# Altium PCB PCB1fbb.PcbDoc
Units mil, origin at the board's own origin, x right, y up, seen from the top; angles counter-clockwise.
Board outline 775 x 2070.57 mil, 2 copper layers (Top Layer, Bottom Layer); 38 components, 55 nets, 170 pads, 36 vias.
Unrouted connection lines stored in the file: 33.
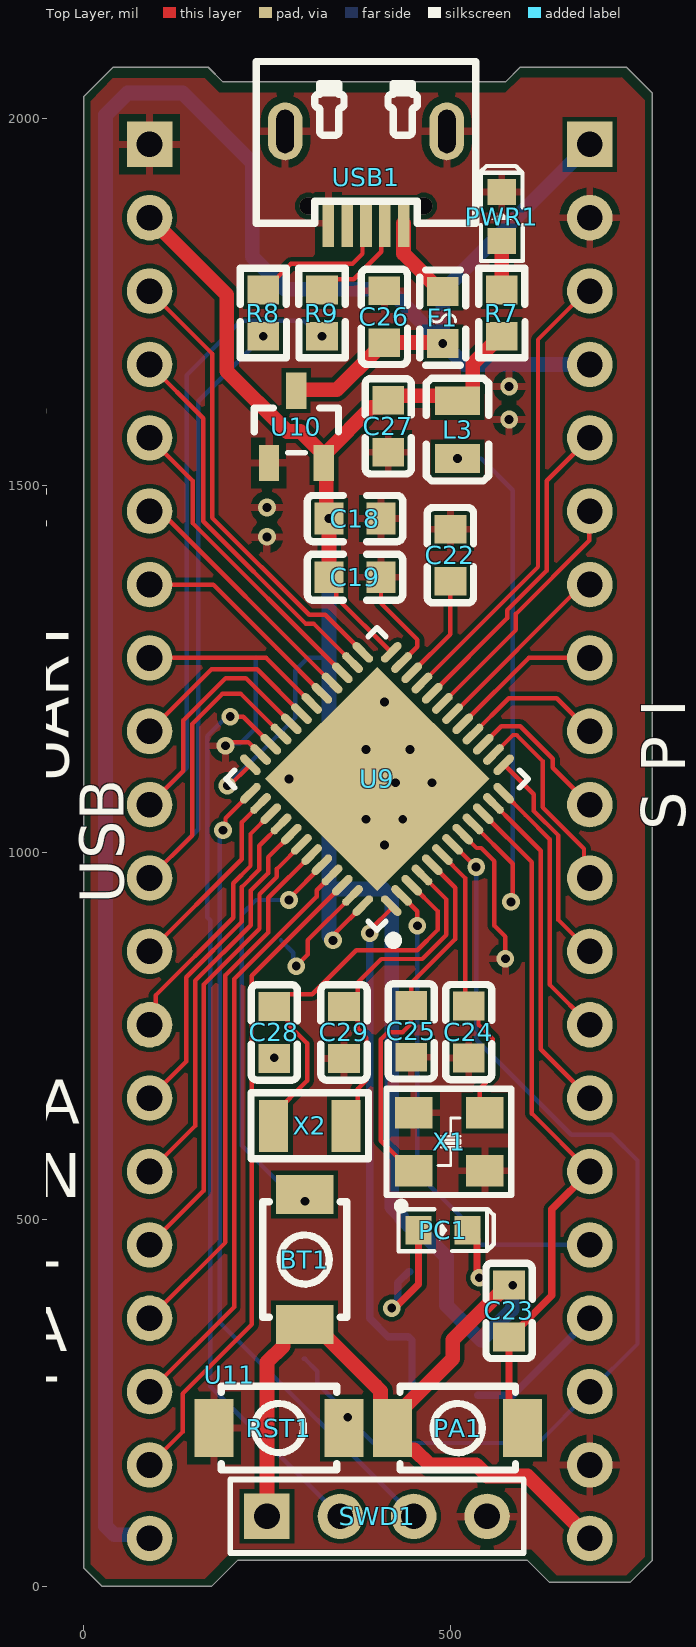
[diagram p0: Top Layer view]
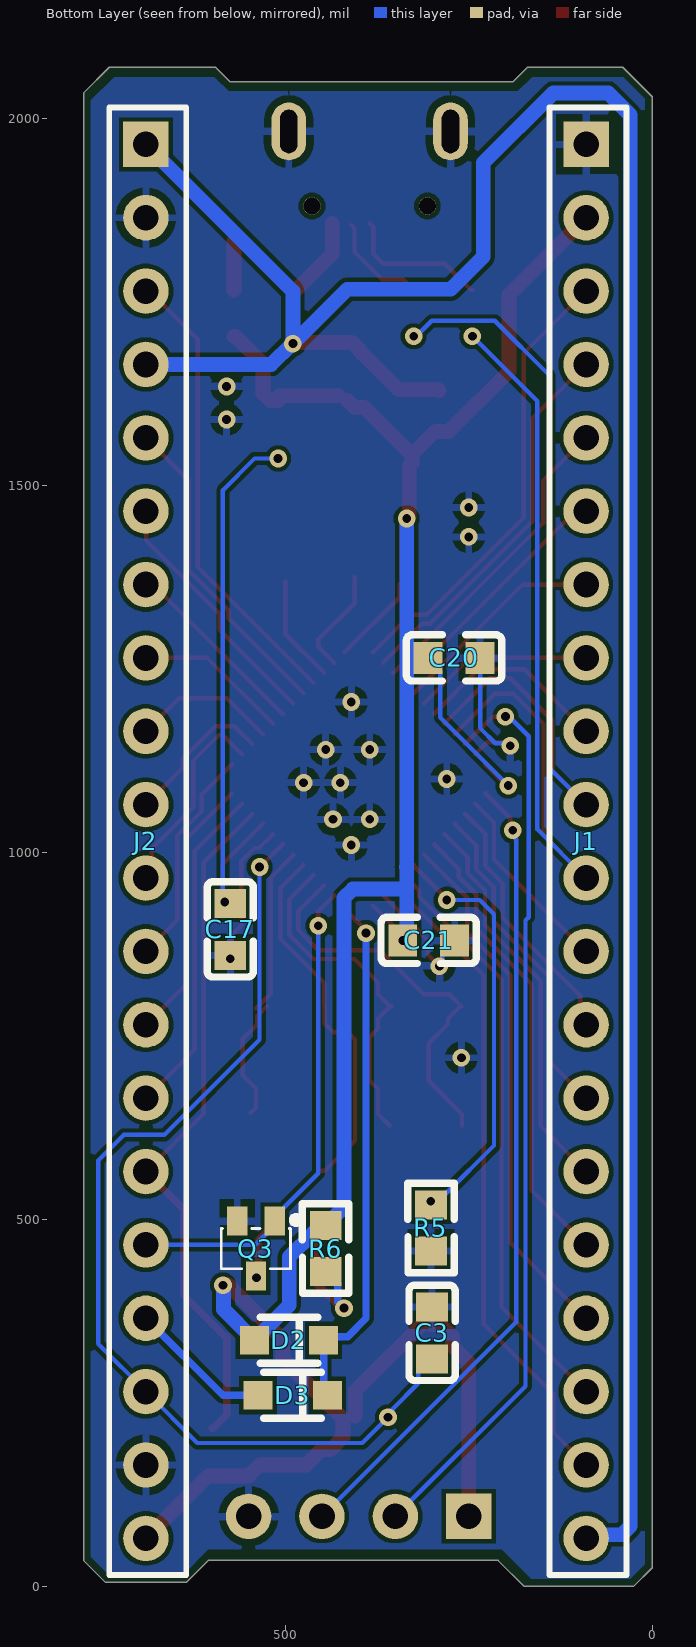
[diagram p1: Bottom Layer view, seen from below]

## Layer stack, top to bottom
Top Solder: solder mask 0.4, Solder Resist, Dk 3.5
Top Layer: signal copper 1.4
Dielectric 1: dielectric 12.6, FR-4, Dk 4.8
Bottom Layer: signal copper 1.4
Bottom Solder: solder mask 0.4, Solder Resist, Dk 3.5

## Board outline
0,25 25.57,-0.57 174.43,-0.57 210,35 605,35 635,5 745,5 775,35 775,2035 740,2070 595,2070 575,2050 190,2050 170,2070 40,2070 0,2030

## Design rules (kind name [scope] priority, off if disabled: settings)
Clearance [All] p1: gap=6 ignorepadtopadclearanceinfootprint=TRUE
MinimumSolderMaskSliver [All] p1: minsoldermaskwidth=0
PolygonConnect [All] p1: connectstyle=Relief reliefconductorwidth=10 reliefentries=4 polygonreliefangle="90 Angle" airgapwidth=10
RoutingVias [All] p1: holewidth=15.75 width=23.62 viastyle="Through Hole" minholewidth=15.75 minwidth=23.62 maxholewidth=28 maxwidth=50
SilkToSolderMaskClearance [IsPad] p1: minsilkscreentomaskgap=0 clearancetoexposedcopper=TRUE
SolderMaskExpansion [All] p1: expansion=4 istentingtop=FALSE
Width [All] p1: maxlimit=20 minlimit=6 preferedwidth=10
28 further rules are at their usual default settings.

## Components (designator, comment, footprint, x,y, rotation, side; value= is the part's Value field where it differs from the comment)
BT1 "TS-1088R-02026" SW-SMD_L3.9-W3.0-P4.45 301.44,445 r270 top
C3 "0.1u" C0603 300,345 r270 bottom
C17 "0.1u" C0603 575,895 r270 bottom
C18 "10u" C0603 370,1455 r180 top
C19 "0.1u" C0603 370,1375 r180 top
C20 "0.1u" C0603 270,1265 r0 bottom
C21 "0.1u" C0603 304.57,880 r0 bottom
C22 "4.7u" C0603 500,1405 r90 top
C23 "0.1u" C0603 580,375 r270 top
C24 "10p" C0603 525,755 r90 top
C25 "10p" C0603 446.71,756.09 r270 top
C26 "10u" C0603 410,1730 r270 top
C27 "1u" C0603 415.35,1580.77 r90 top
C28 "5p" C0603 260,754.57 r90 top
C29 "5p" C0603 355,754.57 r90 top
D2 "BAT54WS_C397611" SOD-323_L1.8-W1.3-LS2.5-RD 495,335 r0 bottom
D3 "BAT54WS_C397611" SOD-323_L1.8-W1.3-LS2.5-RD 490,260 r0 bottom
F1 "0.5A/6V" F0603 489.62,1728.83 r270 top
J1 "HDR-M-2.54_1x20" HDR-M-2.54_1X20 90,1015 r90 bottom locked
J2 "HDR-M-2.54_1x20" HDR-M-2.54_1X20 690,1015 r90 bottom
L3 "10uH" L0805 509.79,1576.18 r270 top
PA1 "TS-1088R-02026" SW-SMD_L3.9-W3.0-P4.45 510,215.29 r180 top
PC1 "LED-0603_R" LED0603_GREEN 490,485 r0 top
PWR1 "LED-0603_G" LED0603_GREEN 570,1866.54 r90 top
Q3 "L2N7002WT1G" SC-70-3_L2.1-W1.3-P1.30-LS2.1-BR 540,460 r90 bottom
R5 "1k" R0603 301.44,488.1 r90 bottom
R6 "1k" R0603 445,460 r270 bottom
R7 "1k" R0603 570,1735 r90 top
R8 "22" R0603 245,1735 r90 top
R9 "22" R0603 325,1735 r90 top
RST1 "TS-1088R-02026" SW-SMD_L3.9-W3.0-P4.45 266.35,215.29 r180 top
SWD1 "HDR-M-2.54_1x4" HDR-M-2.54_1X4 400,95 r0 top
U9 "STM32F401CCU6" UFQFPN-48_L7.0-W7.0-P0.50-BL-EP 400,1100 r45 top locked
U10 "XC6206P332MR" SOT-23(SOT-23-3) 290,1580 r0 top
U11 "CH340E" MSOP-10_L3.0-W3.0-P0.50-LS5.0-BL 198.95,288.05 r90 top
USB1 "U-F-M5DW-Y-4" MICRO-USB-A12 385,1920 r180 top
X1 "25MHz" XTAL-3225 453,568 r90 top
X2 "32.768KHz" OSC-SMD_L3.2-W1.5 308.33,627.29 r180 top

## Footprints (in the part's own frame and the unit in brackets; to place one, negate y for a bottom-side part, rotate by r counter-clockwise, add the part's x,y. Pads: shape width x height; smd on the part's side, far side on the other; paste and mask are expansions set on the pad)
C0603 [mm]
  rect 1x1.1 smd: 1(-0.9,0) 2(0.9,0)
  silkscreen extent -1.65,-0.8 1.65,0.8
F0603 [mm]
  rect 1x1.1 smd: 1(-0.9,0) 2(0.9,0)
  silkscreen extent -1.65,-0.8 1.65,0.8
HDR-M-2.54_1X4 [mil]
  rect 62x62 hole 35: 1(-150,0)
  round 62 hole 35: 2(-50,0) 3(50,0) 4(150,0)
  silkscreen extent -200,-50 200,50
HDR-M-2.54_1X20 [mil]
  rect 62x62 hole 35: 1(950,0)
  round 62 hole 35: 2(850,0) 3(750,0) 4(650,0) 5(550,0) 6(450,0) 7(350,0) 8(250,0) 9(150,0) 10(50,0) 11(-50,0) 12(-150,0) 13(-250,0) 14(-350,0) 15(-450,0) 16(-550,0) 17(-650,0) 18(-750,0) 19(-850,0) 20(-950,0)
  silkscreen extent -1000,-55 1000,50
L0805 [mm]
  rect 1x1.55 smd: 1(-1,0) 2(1,0)
  silkscreen extent -1.78,-1.08 1.78,1.08
LED0603_GREEN [mm]
  rect 0.9x1 smd: 1(-0.85,0) 2(0.85,0)
  silkscreen extent -1.54,-0.73 1.75,0.73
MICRO-USB-A12 [mm]
  rect 0.4x1.65 smd: 1(-1.3,1.59) 2(-0.65,1.59) 3(0,1.59) 4(0.65,1.59) 5(1.3,1.59)
  oval 1.2x2 hole 0.6 slot 1.5 at 90 deg: 6(2.799,-1.59) 7(-2.799,-1.59)
  round 0.6 hole 0.6 unplated: ""(-1.999,0.991) ""(1.999,0.991)
  silkscreen extent -3.8,-4.01 3.8,1.59
MSOP-10_L3.0-W3.0-P0.50-LS5.0-BL [mil]
OSC-SMD_L3.2-W1.5 [mm]
  rect 1x1.8 smd: 1(-1.25,0) 2(1.25,0)
  silkscreen extent -2.03,-1.14 2.03,1.14
R0603 [mm]
  rect 1x1.1 smd: 1(0.8,0) 2(-0.8,0)
  silkscreen extent -1.55,-0.81 1.55,0.8
SC-70-3_L2.1-W1.3-P1.30-LS2.1-BR [mm]
  rect 1x0.7 smd: 1(0.95,-0.65) 2(0.95,0.65) 3(-0.95,0)
  silkscreen extent -0.7,-1.63 1.23,1.2
SOD-323_L1.8-W1.3-LS2.5-RD [mm]
  rect 1x1 smd: 1(-1.2,0) 2(1.2,0)
  silkscreen extent -1,-0.8 1,0.8
SOT-23(SOT-23-3) [mm]
  rect 0.7x1.25 smd: 1(-0.95,-1.25) 2(0.95,-1.25) 3(0,1.25)
  silkscreen extent -1.46,-0.9 1.46,0.65
SW-SMD_L3.9-W3.0-P4.45 [mm]
  rect 1.35x2 smd: 1(-2.25,0) 2(2.25,0)
  silkscreen extent -2,-1.45 2,1.45
UFQFPN-48_L7.0-W7.0-P0.50-BL-EP [mm]
  oval 0.28x0.9 smd: 1(-2.751,-3.449) 2(-2.25,-3.449) 3(-1.75,-3.449) 4(-1.25,-3.449) 5(-0.749,-3.449) 6(-0.249,-3.449) 7(0.249,-3.449) 8(0.749,-3.449) 9(1.25,-3.449) 10(1.75,-3.449) 11(2.25,-3.449) 12(2.751,-3.449) 25(2.751,3.449) 26(2.25,3.449) 27(1.75,3.449) 28(1.25,3.449) 29(0.749,3.449) 30(0.249,3.449) 31(-0.249,3.449) 32(-0.749,3.449) 33(-1.25,3.449) 34(-1.75,3.449) 35(-2.25,3.449) 36(-2.751,3.449)
  oval 0.9x0.28 smd: 13(3.449,-2.751) 14(3.449,-2.25) 15(3.449,-1.75) 16(3.449,-1.25) 17(3.449,-0.749) 18(3.449,-0.249) 19(3.449,0.249) 20(3.449,0.749) 21(3.449,1.25) 22(3.449,1.75) 23(3.449,2.25) 24(3.449,2.751) 37(-3.449,2.751) 38(-3.449,2.25) 39(-3.449,1.75) 40(-3.449,1.25) 41(-3.449,0.749) 42(-3.449,0.249) 43(-3.449,-0.249) 44(-3.449,-0.749) 45(-3.449,-1.25) 46(-3.449,-1.75) 47(-3.449,-2.25) 48(-3.449,-2.751)
  rect 5.5x5.5 smd: 49(0,0)
  silkscreen extent -3.7,-4.5 3.7,3.7
XTAL-3225 [mil]
  rect 43.31x51.18 smd: 1(-2,3) 2(-2,-94) 3(77,-94) 4(77,3)
  silkscreen extent -55,-130 110,40, body extent -13,-108 85,18, height 31

## Part data
BT1 PA1 RST1: BOM_Manufacturer=XUNPU, BOM_Manufacturer Part=TS-1088R-02026, BOM_Supplier=LCSC, BOM_Supplier Part=C455280, Contributor=LCSC, spicePre=S, spiceSymbolName=TS-1088R-02026
D2 D3: BOM_Manufacturer=AnBon, BOM_Manufacturer Part=BAT54WS, BOM_Supplier=LCSC, BOM_Supplier Part=C397611, Contributor=LCSC, spicePre=D, spiceSymbolName=BAT54WS_C397611
F1: BOM_Manufacturer=BOURNS, BOM_Manufacturer Part=MF-FSMF050X-2, BOM_Supplier=LCSC, BOM_Supplier Part=C210357, Contributor=LCSC, spicePre=F, spiceSymbolName=MF-FSMF050X-2
L3: BOM_Manufacturer=microgate, BOM_Manufacturer Part=MGFI2012D100KT-LF, BOM_Supplier=LCSC, BOM_Supplier Part=C281097, Contributor=LCSC, nameAlias=Inductance, spicePre=L, spiceSymbolName=MGFI2012D100KT-LF
PC1: BOM_Manufacturer=EVERLIGHT(台湾亿光), BOM_Manufacturer Part=19-217/R6C-AL1M2VY/3T, BOM_Supplier=LCSC, BOM_Supplier Part=C72044, Contributor=LCEDA_01, spicePre=L, spiceSymbolName=LED-0603_R
PWR1: BOM_Manufacturer=EVERLIGHT(台湾亿光), BOM_Manufacturer Part=19-217/GHC-YR1S2/3T, BOM_Supplier=LCSC, BOM_Supplier Part=C72043, Contributor=LCEDA_Lib, spicePre=L, spiceSymbolName=LED-0603_G
Q3: BOM_LCSC Assembly=Yes, BOM_Manufacturer=LRC, BOM_Manufacturer Part=L2N7002WT1G, BOM_Supplier=LCSC, BOM_Supplier Part=C12778, SMT Type=Extend, spicePre=Q, spiceSymbolName=L2N7002WT1G
U9: BOM_Manufacturer=ST, BOM_Manufacturer Part=STM32F401CCU6, BOM_Supplier=LCSC, BOM_Supplier Part=C79861, spicePre=U, spiceSymbolName=STM32F401CCU6, subpart_no=1, tags=STM32
U10: BOM_LCSC Assembly=Yes, BOM_Manufacturer=TOREX, BOM_Manufacturer Part=XC6206P332MR, BOM_Supplier=LCSC, BOM_Supplier Part=C5446, image=//image.lceda.cn/szlcsc/C5446.jpg, SMT Type=Basic, spicePre=U
U11: BOM_LCSC Assembly=Yes, BOM_Manufacturer=WCH, BOM_Manufacturer Part=CH340E, BOM_Supplier=LCSC, BOM_Supplier Part=C99652, SMT Type=Extend, spicePre=U, spiceSymbolName=CH340E
USB1: BOM_Manufacturer=HRO, BOM_Manufacturer Part=U-F-M5DW-Y-4, BOM_Supplier=LCSC, BOM_Supplier Part=C145784, Contributor=LCSC, spicePre=U
X1: BOM_LCSC Assembly=Yes, BOM_Manufacturer="Zhejiang Abel Elec", BOM_Manufacturer Part=TAXM8M4RDBCCT2T, BOM_Supplier=LCSC, BOM_Supplier Part=C400090, Contributor=LCSC, nameAlias=Frequency, SMT Type=Extend, spicePre=X, spiceSymbolName=TAXM8M4RDBCCT2T
X2: BOM_Manufacturer=EPSON, BOM_Manufacturer Part=Q13FC1350004900, BOM_Supplier=LCSC, BOM_Supplier Part=C95361, nameAlias=Frequency, spicePre=X, spiceSymbolName=Q13FC1350004900
C3 C17 C19 C20 C21 C22 C23 C24 C25 C28 C29: Contributor=LCEDA_Lib, nameAlias=Value(F), spicePre=C, spiceSymbolName=C_0402_US
C18: Contributor=LCEDA_Lib, nameAlias=Value(F), spicePre=C, spiceSymbolName=C_0805_US
C26: nameAlias=Value(F), spicePre=C, spiceSymbolName=Cap_0805_US
C27: nameAlias=Value(F), spicePre=C, spiceSymbolName=Cap_RAD-0.1_US
J1 J2: BOM_Supplier=LCSC, BOM_Supplier Part=C50981, Contributor=LCEDA_Lib, spicePre=J, spiceSymbolName=HDR-M-2.54_1x20
R5 R6 R7: Contributor=LCEDA_Lib, nameAlias=Value(Ω), spicePre=R, spiceSymbolName=R_0402_US
R8 R9: Contributor=LCEDA_Lib, nameAlias=Value(Ω), spicePre=R, spiceSymbolName=R_0603_US
SWD1: BOM_Supplier=LCSC, BOM_Supplier Part=C124378, Contributor=LCEDA_Lib, spicePre=J, spiceSymbolName=HDR-M-2.54_1x4

## Via types
v1: diameter 24, hole 12, Top Layer to Bottom Layer, 36 vias

## Nets (pads, with @x,y where several pads share a name; then routed paths per layer and width w, separated by ;. In a path a pad name is that pad's centre, name@x,y a point inside that pad or via, vN(x,y) a via of type N, cw(c..) or ccw(c..) an arc to the next point about the centre after c; other vN are vias at no path point)
+5V: C26.2 F1.2 J1.20 J2.1 J2.4 U10.3 | length 3474.1
  Top Layer w20: U10.3 291.11,1630.31 345.31,1630.31 398.35,1683.35 398.35,1684.88 408.03,1694.57 C26.2 410.43,1695 488.01,1695 v1(489.62,1693.4)
  Bottom Layer w20: J1.20 85,70 41.72,70 30,81.72 30,2005 60,2035 135,2035 230,1940 230,1811.72 274.39,1767.33 415.68,1767.33 v1(489.62,1693.4) ; J2.4 519.09,1665 490.7,1693.4 v1(489.62,1693.4) ; J2.1 489.62,1764.62 v1(489.62,1693.4)
BAT: D3.2 J2.17 | length 196.2
  Bottom Layer w10: D3.2 585,260 J2.17
BOOT0: BT1.1 R5.1 U9.44 | length 572.8
  Top Layer w6: v1(280,935) 280,936.92 324.83,981.76 U9.44
  Bottom Layer w6: v1(280,935) 235,935 215.53,915.53 215.53,600.5 R5.1@281.27,534.76 ; R5.1@282.78,536.27 294.3,524.76 299.47,519.59 R5.1
  other v1: 301.63,524.58
GND: C3.1 C17.2 C18.1 C19.1 C20.1 C21.1 C22.2 C24.1 C25.2 C26.1 C27.1 C28.1 C29.1 J1.1 J2.2 J2.19 PWR1.2 Q3.2 R5.2 RST1.2 SWD1.4 U9.8 U9.23 U9.35 U9.47 U9.49 U10.1 USB1.5 USB1.6 USB1.7 X1.2 X1.4 | length 722.9
  Top Layer w6: v1(193.44,1145.33) 198.32,1145.33 202.99,1150 224.7,1150 U9.35 ; v1(290,845) 305.76,860.76 305.76,880.46 U9.47 ; C19.1 405.43,1339.57 455,1290 455,1280.3 U9.23 ; U9.8 535.72,1006 541.94,1006 560,987.94 560,900 575,885 v1(575,855)
  Bottom Layer w6: v1(193.44,1145.33) 196.89,1148.77 213.77,1148.77 234.57,1169.57 C20.1 ; C21.1 285.82,863.32 285.82,854.05 290,849.87 v1(290,845)
  Bottom Layer w10: v1(575,855) C17.2
  other v1: 260,720 410,1010 385,1045 435,1045 425,1095 475,1095 280,1100 385,1140 445,1140 410,1205 250,1430 250,1470 580,1590 580,1635
NetF1_1: F1.1 USB1.1 | length 116.4
  Top Layer w20: USB1.1 436.2,1815.71 487.65,1764.26 F1.1
NetJP1_1: R8.1 USB1.3 | length 199.2
  Top Layer w6: R8.1 246.97,1766.49 282.66,1802.18 366.54,1802.18 380.27,1815.92 380.27,1852.67 USB1.3
NetJP1_2: 
NetJP2_1: R9.1 USB1.2 | length 140.5
  Top Layer w6: R9.1 339.68,1781.18 368.22,1781.18 405.73,1818.69 405.73,1850.77 USB1.2@410,1855.05
NetJP2_2: 
NetJP3_1: 
NetJP4_1: 
NetPC1_1: PC1.1 R6.1 | length 184.8
  Top Layer w10: v1(420,378.79) 423.79,378.79 456.53,411.53 PC1.1
  Bottom Layer w10: v1(420,378.79) 428.35,387.13 428.35,413.82 443.03,428.51 R6.1
NetPC1_2: PC1.2 Q3.3 | length 74
  Top Layer w10: PC1.2 536.18,472.28 536.18,427.18 539.34,424.01 v1(539.34,420.22)
  Bottom Layer w10: v1(539.34,420.22) 539.34,421.95 Q3.3
NetPWR1_1: PWR1.1 R7.1 | length 66.6
  Top Layer w20: R7.1 PWR1.1
NRST: C3.2 J2.18 RST1.1 U9.7 | length 1389.3
  Top Layer w6: U9.7 503.53,1010.91 534.43,980 v1(535,980)
  Bottom Layer w6: C3.2 301.97,309.57 318.65,292.88 318.65,276.35 353.65,241.35 353.65,241.22 360,234.87 v1(360,230) 395,195 620,195 J2.18 755,330 755,580 720,615 664.81,615 535.14,744.67 535.14,979.86 v1(535,980)
OSC32-IN: C28.2 U9.3 X2.2 | length 542.3
  Top Layer w6: X2.2 259.12,643.04 304.65,688.58 304.65,739.82 278.27,766.2 278.27,773.32 261.58,790 C28.2 276.68,806.68 311.68,806.68 371.68,866.68 454.94,866.68 482.53,894.28 482.53,920.03 U9.3
OSC32-OUT: C29.2 U9.4 X2.1 | length 471.1
  Top Layer w6: C29.2 C29.2@356.97,790 ; X2.1 373.65,643.4 373.65,677.55 385.65,689.55 385.65,747.46 373.65,759.46 373.65,773.32 C29.2@356.97,790 ; U9.4 494.62,935.8 494.62,887.59 461.71,854.68 405.66,854.68 373.65,822.67 373.65,806.68 C29.2@356.97,790
OSC-IN: C25.1 U9.5 X1.1 | length 504.9
  Top Layer w6: X1.1 446.06,566 427.41,584.65 405,607.06 405,745 415,755 435,755 446.35,766.35 446.35,791.16 C25.1 446.71,821.86 506.62,881.76 506.62,951.66 U9.5
OSC-OUT: C24.2 U9.6 X1.3 | length 400.4
  Top Layer w6: U9.6 489.09,995.91 520,965 520,807.12 539.72,787.4 C24.2@540,787.4 ; C24.2 538.37,777.06 538.37,765.26 558.08,745.56 558.08,695.98 540,677.9 540,652 X1.3
PA0: C23.2 J2.15 PA1.1 U9.10 | length 953.5
  Top Layer w6: U9.10 611.1,986.34 611.1,643.9 J2.15
  Top Layer w10: PA1.1@600,215 599.71,215.29 PA1.1 580,233.88 C23.2 581.97,339.57 638.35,395.95 638.35,513.35 J2.15
PA1: J2.14 U9.11 | length 456
  Top Layer w6: U9.11 589.69,1035.61 623.21,1002.09 623.21,731.79 J2.14
PA2: J2.13 U9.12 | length 364.2
  Top Layer w6: U9.12 601.69,1051.47 635.21,1017.95 635.21,819.79 J2.13
PA3: J2.12 U9.13 | length 303.6
  Top Layer w6: U9.13 573.5,1119.45 613.69,1079.25 613.69,1056.44 647.21,1022.92 647.21,907.79 J2.12
PA4: J2.11 U9.14 | length 278.9
  Top Layer w6: U9.14 585.28,1159.98 590.25,1159.98 625.69,1124.54 625.69,1061.41 682.1,1005 682.1,972.9 J2.11
PA5: J2.10 U9.15 | length 206.9
  Top Layer w6: U9.15 569.42,1171.98 595.22,1171.98 639.55,1127.66 639.55,1115.45 J2.10
PA6: J2.9 U9.16 | length 198
  Top Layer w6: U9.16 579.58,1210 645,1210 J2.9
PA7: J2.8 U9.17 | length 210.3
  Top Layer w6: U9.17 606.72,1265 J2.8
PA8: J1.7 U9.29 | length 296.2
  Top Layer w6: J1.7 176.72,1365 263.26,1278.46 U9.29
PA9: J1.8 U9.30 | length 246.6
  Top Layer w6: J1.8 248.86,1265 U9.30
PA10: J1.9 U9.31 | length 267
  Top Layer w6: J1.9 174.41,1249.41 236.73,1249.41 U9.31
PA11: J1.10 R9.2 U9.32 | length 1161.2
  Top Layer w6: J1.10 136.11,1111.11 136.11,1179.95 193.57,1237.41 221.3,1237.41 283.11,1175.59 U9.32
  Bottom Layer w6: J1.10 140.49,1115.49 140.49,1650.49 214.51,1724.51 300.5,1724.51 321.5,1703.51 v1(325,1703.51)
PA12: J1.11 R8.2 U9.33 | length 1197.5
  Top Layer w6: J1.11 148.11,1023.11 148.11,1174.98 189.1,1215.97 214.45,1215.97 U9.33
  Bottom Layer w6: J1.11 156.34,1031.34 156.34,1614.85 v1(245,1703.51)
PA15: J1.12 U9.38 | length 264.3
  Top Layer w6: J1.12 215.53,990.53 215.53,1040.83 U9.38
PB0: J2.7 U9.18 | length 259.9
  Top Layer w6: U9.18 504.31,1189.09 680.22,1365 J2.7
PB1: J2.6 U9.19 | length 345.3
  Top Layer w6: U9.19 589.33,1303.19 589.33,1324.96 689.36,1425 689.36,1464.36 J2.6
PB2: J2.5 U9.20 | length 437.1
  Top Layer w6: U9.20 577.33,1319.05 577.33,1329.93 631.46,1384.07 631.46,1506.46 J2.5
PB3: J1.13 U9.39 | length 356.1
  Top Layer w6: J1.13 98.18,773.18 98.18,805 203.88,910.7 203.88,957.9 227.53,981.55 227.53,1024.97 U9.39
PB4: J1.14 U9.40 | length 448
  Top Layer w6: J1.14 140,715 140,829.85 215.88,905.73 215.88,952.93 239.53,976.58 239.53,1009.11 U9.40
PB5: J1.15 U9.41 | length 539.8
  Top Layer w6: J1.15 152,627 152,824.88 227.88,900.76 227.88,947.96 251.53,971.61 251.53,993.25 U9.41
PB6: J1.16 U9.42 | length 631.7
  Top Layer w6: J1.16 164,539 164,819.91 239.88,895.79 239.88,942.99 263.53,966.64 263.53,977.39 U9.42
PB7: J1.17 U9.43 | length 723.5
  Top Layer w6: J1.17 193.39,468.39 193.39,832.33 251.88,890.82 251.88,938.02 U9.43
PB8: J1.18 U9.45 | length 807.2
  Top Layer w6: J1.18 205.39,380.39 205.39,827.36 317.78,939.75 317.78,948.2 U9.45
PB9: J1.19 U9.46 | length 899.1
  Top Layer w6: J1.19 135,210 135,262.26 229.35,356.61 229.35,831.91 U9.46
PB10: J2.3 U9.21 | length 631.5
  Top Layer w6: U9.21 619.46,1389.04 619.46,1698.9 685.56,1765 J2.3
PB12: J1.3 U9.25 | length 625.5
  Top Layer w6: J1.3 175.22,1679.78 175.22,1456.16 307.61,1323.77 329.39,1323.77 U9.25
PB13: J1.4 U9.26 | length 527.3
  Top Layer w6: J1.4 163.22,1591.78 163.22,1451.19 302.64,1311.77 313.53,1311.77 U9.26
PB14: J1.5 U9.27 | length 429.1
  Top Layer w6: J1.5 148.63,1506.37 148.63,1448.81 U9.27
PB15: J1.6 U9.28 | length 345.8
  Top Layer w6: J1.6 104.58,1465 U9.28
PC13: J2.16 Q3.1 U9.2 | length 670
  Top Layer w6: U9.2 455,919.7 v1(455,900)
  Bottom Layer w6: v1(455,900) 455,562.72 514.41,503.31 Q3.1 514.41,491.5 540.91,465 J2.16
SWCLK: SWD1.3 U9.37 | length 1112.5
  Top Layer w6: v1(190,1030) 193.44,1033.44 193.44,1046.6 U9.37
  Bottom Layer w6: v1(190,1030) 186.56,1026.56 186.56,1018.61 185.43,1017.49 185.43,359.57 SWD1.3
SWDIO: SWD1.2 U9.34 | length 1252.2
  Top Layer w6: v1(200,1185) 217.56,1185 U9.34
  Bottom Layer w6: v1(200,1185) 195.13,1185 188.78,1178.65 188.65,1178.65 168.34,1158.34 168.34,911.66 172.56,907.44 172.56,272.44 SWD1.2
VBAT: D2.1 D3.1 U9.1 | length 723.3
  Top Layer w6: v1(390,890) 390,893.79 421.19,924.98 421.19,925.65 U9.1
  Bottom Layer w10: v1(390,890) 390,365 415,340 442.76,340 D2.1 447.76,265 D3.1@452.76,260
VCAP1: C22.1 U9.22 | length 146.6
  Top Layer w6: U9.22 500,1297.44 C22.1
VCC: BT1.2 C18.2 C19.2 C20.2 C21.2 C23.1 C27.2 D2.2 J1.2 J2.20 L3.1 PA1.2 R6.2 R7.2 SWD1.1 U9.24 U9.36 U9.48 U10.2 | length 3959.1
  Top Layer w6: v1(196,1091) 198.95,1091 225.75,1117.8 U9.36 ; BT1.2 BT1.2@314.23,356.41 ; C19.2 344.19,1365.38 344.19,1347.86 U9.24 ; v1(340,880) 343.44,883.44 343.44,890.28 U9.48 ; 397.84,272.8 397.84,238.87 404.84,231.87 PA1.2@415.02,221.69
  Top Layer w20: J1.2 195,1760 195,1655.99 277.3,1573.69 295.34,1573.69 U10.2@327.4,1541.63 ; SWD1.1 250,304.97 272.07,327.04 272.07,339.84 288.64,356.41 BT1.2 ; BT1.2@314.23,356.41 397.84,272.8 404.84,265.8 PA1.2@404.84,231.87 ; C19.2 v1(334.57,1455) 330.98,1458.58 330.98,1527.22 U10.2 U10.2@327.4,1541.63 ; C27.2 405.67,1606.51 392.29,1606.51 331.18,1545.41 U10.2@327.4,1541.63 ; C27.2@426.97,1622.4 L3.1@508.03,1622.4 ; L3.1 520.61,1615.55 530.3,1625.24 530.3,1665.77 568.03,1703.51 R7.2 ; C23.1 578.03,410.43 503.17,335.57 503.17,309.84 421.42,228.09 PA1.2 421.42,202.49 437.99,185.92 450.79,185.92 471.71,165 535,165 550,150 605,150 J2.20
  Bottom Layer w6: v1(196,1091) 288.75,1183.75 288.75,1248.32 C20.2 334.57,1265
  Bottom Layer w20: v1(334.57,1455) 334.57,1265 334.57,980.43 ; 335,980 334.57,980.43 ; v1(340,880) 334.57,885.43 334.57,950 ; v1(585,410) 584.23,409.23 584.23,376.99 D2.2 494.61,382.64 494.61,448.7 461.5,481.81 454.68,481.81 R6.2 443.03,491.49 433.35,501.18 433.35,503.15 420,516.49 420,938.28 408.28,950 334.57,950 ; 334.57,950 334.57,980.43
VDDA: C17.1 L3.2 U9.9 | length 789
  Top Layer w6: U9.9 585,984.58 585,934.85 v1(582.58,932.42)
  Bottom Layer w6: v1(509.79,1536.81) 541.91,1536.81 585,1493.72 585,934.85 v1(582.58,932.42) 585.15,929.85 C17.1@585,929.69
pads on no net: USB1. USB1.4

## Polygon pours and split planes (outlines as drawn)
GND on Top Layer "GND_L01_P002" (solid, pour order 2): 39.92,2054.92 10,2023.76 10,30 30,10 165,10 205,50 610,50 645,15 740,15 765,40 765,2025 733.66,2056.34 596,2056 575.01,2035 185,2035 165,2055
GND on Bottom Layer "GND_L02_P003" (solid, pour order 3): 39.37,2056.61 10,2027.24 10,30 30,10 165,10 205,50 605,50 640,15 740,15 765,40 765,2025 733.48,2056.52 596.52,2056.52 577.12,2037.12 182.96,2037.12 163.36,2056.53

## Silkscreen, mask and mechanical layers (free items; w line width, h text height)
Top Overlay:
  text "D0" at 870,1740 h60
  text "PCLK" at -270,1635 h60
  text "D1" at 875,1550 h60
  text "HREF" at -265,1545 h60
  text "D2" at 865,1455 h60
  text "VSYNC" at -325,1440 h60
  text "D3" at 860,1355 h60
  text "OLED_SCL" at -520,1340 h60
  text "UART" at -20,1095 h60 r90
  text "S P I" at 820,1030 h60 r90
  text "D4" at 840,935 h60
  text "USB" at 55,930 h60 r90
  text "D5" at 840,835 h60
  text "D6" at 840,740 h60
  text "D7" at 840,645 h60
  text "OLED_SDA" at -445,630 h60
  text "PWDN" at -260,530 h60
  text "SCCB_SCL" at -455,435 h60
  text "SCCB_SDA" at -460,320 h60
  text "RESET" at -300,225 h60
Mechanical 1:
  the board outline again, w10